# EAGLE board ChairControl (EAGLE 8.7.0)
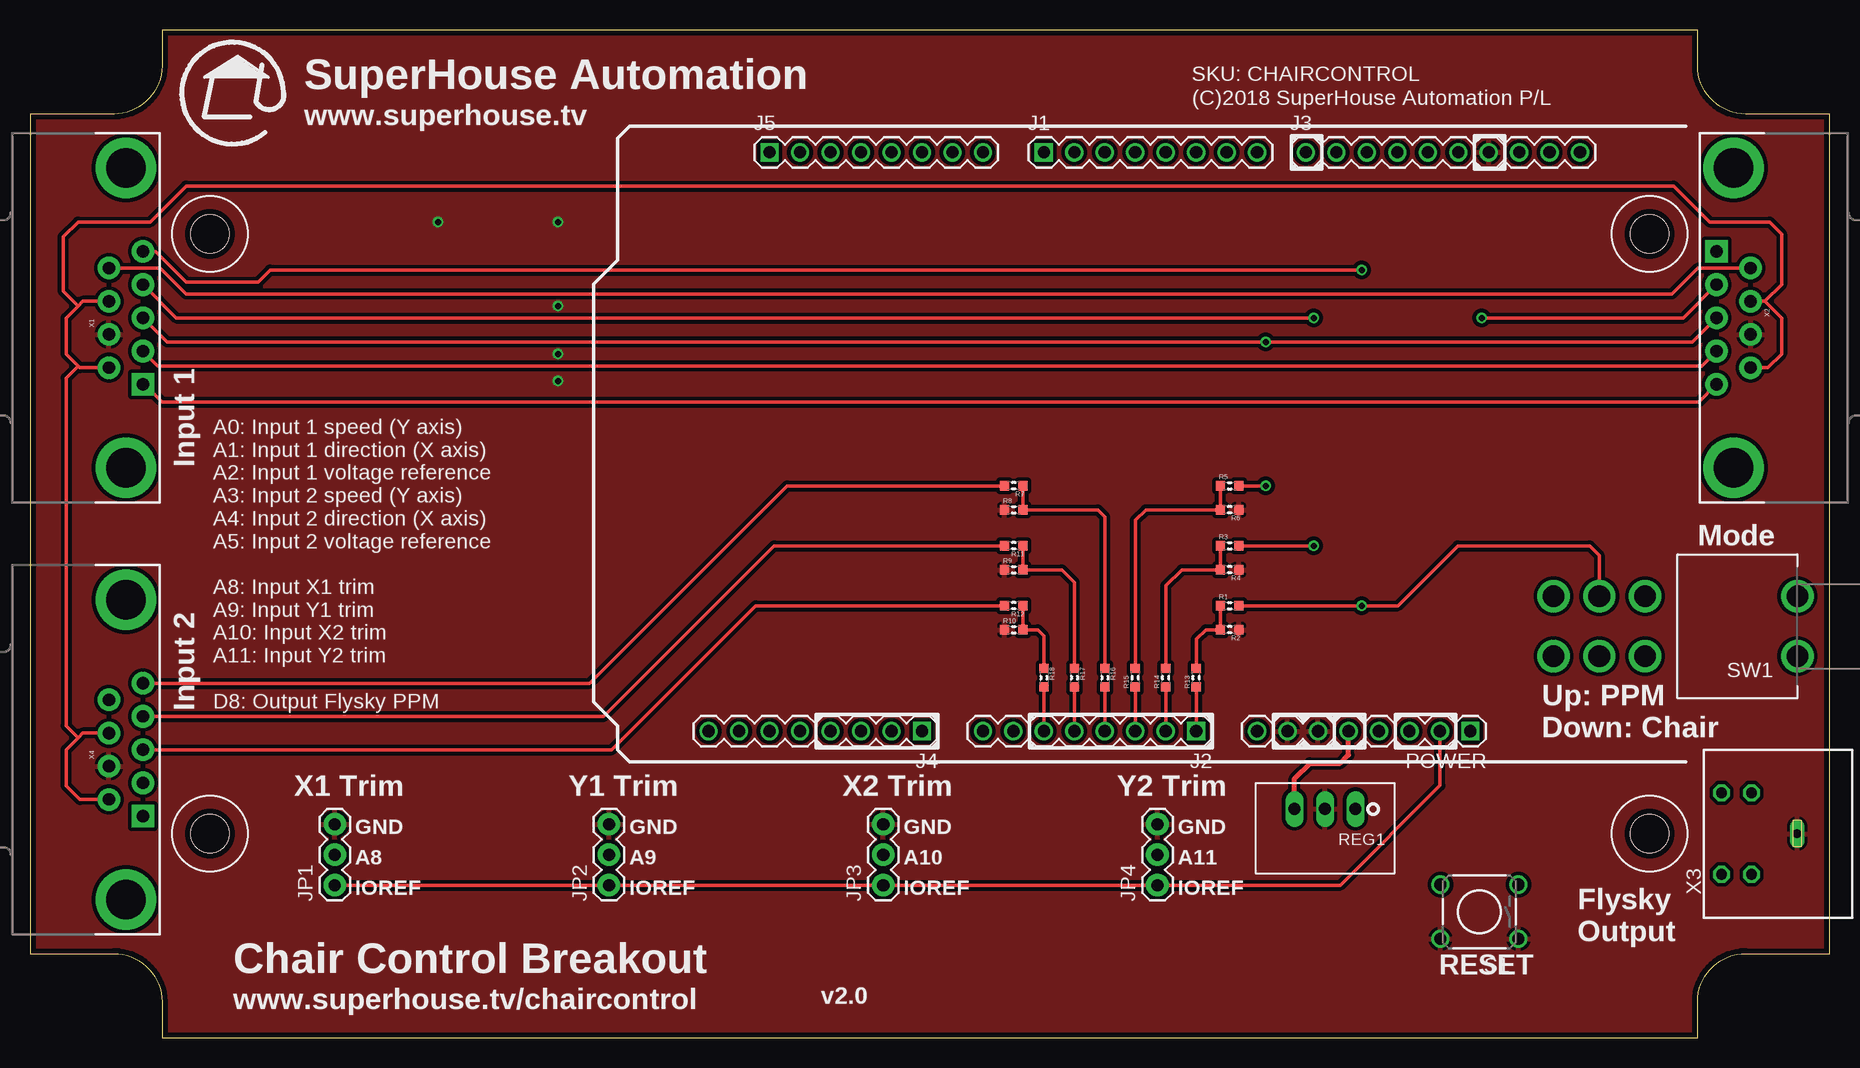
[diagram p0: board, top side]
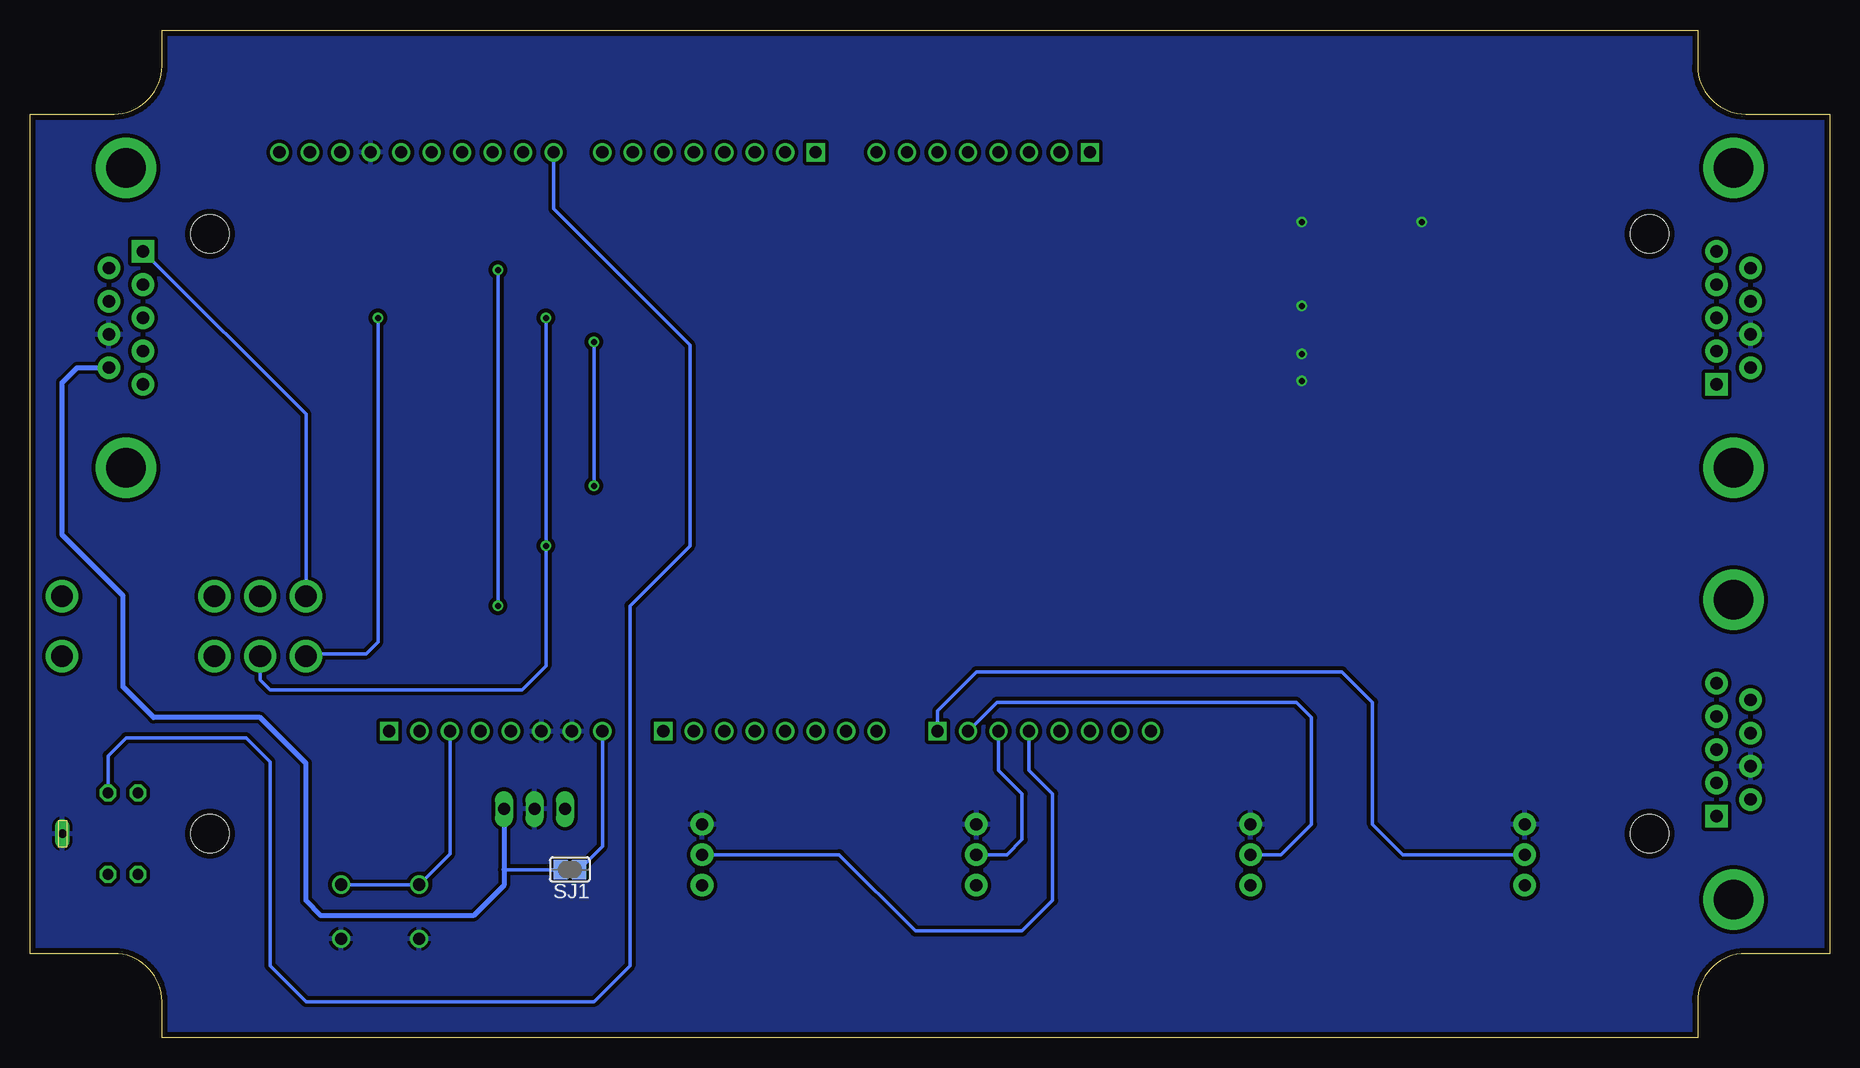
[diagram p1: board, bottom side, seen from below]

Size 150 x 84 mm. Coordinates in mm from the lower left corner, seen from the top.
Outline: 143,77 arc-90 139,81 139,84 11,84 11,81 arc-90 7,77 0,77 0,7 7,7 arc-90 11,3 11,0 139,0 139,3 arc-90 143,7 150,7 150,77 143,77
Copper layers (1*16): Top 0.035mm / dielectric 1.5mm / Bottom 0.035mm
Design rules "default *": minimum track width 10mil, minimum drill 24mil, track to track 12mil, track to pad 12mil, pad to pad 12mil, via to via 12mil, smd to smd 8mil, copper to edge 18mil, drill to drill 8mil, minimum pad ring 10mil, minimum via ring 8mil, stop-mask expansion 4mil, vias tented up to drill 0mil, thermal gap 10mil
Holes 3.2 mm at 15,67 15,17 135,67 135,17

## Footprints (pad centres in the part's own frame; a part is rotated, then mirrored left to right if it is on the bottom)
1X08 = drill 1.016 square: 1 0,0 | drill 1.016: 2 2.54,0; 3 5.08,0; 4 7.62,0; 5 10.16,0; 6 12.7,0; 7 15.24,0; 8 17.78,0
1X10 = drill 1.016: 1 0,0; 2 2.54,0; 3 5.08,0; 4 7.62,0; 5 10.16,0; 6 12.7,0; 7 15.24,0; 8 17.78,0; 9 20.32,0; 10 22.86,0
1X03 = drill 1.016 pad 1.88: 1 0,0; 2 2.54,0; 3 5.08,0
0603 = smd 0.762 x 0.762: 1 -0.762,0; 2 0.762,0
K78XX-500R3 = drill 1 long: 1 -2.54,0; 2 0,0; 3 2.54,0
TACTILE-PTH = drill 1.016: 1 -3.251,2.261; 2 3.251,2.261; 3 -3.251,-2.261; 4 3.251,-2.261
SJ = smd 1.168 x 1.6: 1 -0.762,0; 2 0.762,0
7201SD9AV2BE = drill 1.8: 1 12.7,-2.5; 2 16.51,-2.5; 3 20.32,-2.5; 4 20.32,2.5; 5 16.51,2.5; 6 12.7,2.5; 7 0,2.5; 8 0,-2.5
DB9_MALE = drill 1.016 pad 1.88: 1 5.54,-1.42; 2 2.77,-1.42; 3 0,-1.42; 4 -2.77,-1.42; 6 4.15,1.42; 7 1.38,1.42; 8 -1.38,1.42; 9 -4.15,1.42 | drill 1.016 pad 1.88 square: 5 -5.54,-1.42 | drill 3.302 pad 5.08: G1 -12.5,0; G2 12.5,0
DB9 = drill 1.016 pad 1.88 square: 1 -5.54,-1.42 | drill 1.016 pad 1.88: 2 -2.77,-1.42; 3 0,-1.42; 4 2.77,-1.42; 5 5.54,-1.42; 6 -4.15,1.42; 7 -1.38,1.42; 8 1.38,1.42; 9 4.15,1.42 | drill 3.302 pad 5.08: G1 -12.5,0; G2 12.5,0
MDIN04S = drill 0.9 octagon: 1 3.4,8.5; 2 -3.4,8.5; 3 3.4,11; 4 -3.4,11 | drill 0.7 long: M 0,4.7

## Placement (x,y rotation side)
J1  Digital_0_7  [1X08]  84.51,73.8 0 top
J2  Analog  [1X08]  97.21,25.54 180 top
J3  Digital_8_13  [1X10]  106.35,73.8 0 top
J4  Analog  [1X08]  74.35,25.54 180 top
J5  Digital_0_7  [1X08]  61.65,73.8 0 top
JP1  [1X03]  25.4,12.7 90 top
JP2  [1X03]  48.26,12.7 90 top
JP3  [1X03]  71.12,12.7 90 top
JP4  [1X03]  93.98,12.7 90 top
POWER  Power  [1X08]  120.07,25.54 180 top
R1  47K 1%  [0603]  100,36 0 top
R2  47K 1%  [0603]  100,34 180 top
R3  47K 1%  [0603]  100,41 0 top
R4  47K 1%  [0603]  100,39 180 top
R5  47K 1%  [0603]  100,46 0 top
R6  47K 1%  [0603]  100,44 180 top
R7  47K 1%  [0603]  82,46 180 top
R8  47K 1%  [0603]  82,44 0 top
R9  47K 1%  [0603]  82,39 0 top
R10  47K 1%  [0603]  82,34 0 top
R11  47K 1%  [0603]  82,41 180 top
R12  47K 1%  [0603]  82,36 180 top
R13  1K  [0603]  97.21,30 90 top
R14  1K  [0603]  94.67,30 90 top
R15  1K  [0603]  92.13,30 90 top
R16  1K  [0603]  89.59,30 270 top
R17  1K  [0603]  87.05,30 270 top
R18  1K  [0603]  84.51,30 270 top
REG1  K7805-500R3  [K78XX-500R3]  107.95,19.05 180 top
S1  RESET  [TACTILE-PTH]  120.82,10.49 180 top
SJ1  [SJ]  105,14 180 bottom
SW1  SWITCH-DPDT3  [7201SD9AV2BE]  147.32,34.29 180 top
X1  INPUT  [DB9_MALE]  8,60 90 top
X2  OUTPUT  [DB9]  142,60 270 top
X3  [MDIN04S]  152,17 90 top
X4  INPUT  [DB9_MALE]  8,24 90 top

## Library data of the parts
J1 J5 S1 = freetronics
J2 J4 JP1-JP4 R1-R18 REG1 SJ1 SW1 = freetronics-jon
J3 POWER = freetronics-original
X1 X2 X4 = SparkFun-Connectors
X3 = freetronics-jon; OC_FARNELL: unknown; OC_NEWARK: unknown

## Nets
3V3: POWER.4
5V: POWER.5 REG1.3
12V: REG1.1 SJ1.2 X1.7 X1.9 X2.7 X2.9 X4.7 X4.9
A0: J2.1 R13.1
A1: J2.2 R14.1
A2: J2.3 R15.1
A3: J2.4 R16.2
A4: J2.5 R17.2
A5: J2.6 R18.2
A8: J4.1 JP1.2
A9: J4.2 JP2.2
A10: J4.3 JP3.2
A11: J4.4 JP4.2
AREF: J3.8
D0_RX: J1.1
D1_TX: J1.2
D2: J1.3
D3: J1.4
D4: J1.5
D5: J1.6
D6: J1.7
D7: J1.8
D8: J3.1 X3.1
D9: J3.2
D10: J3.3
D11_MOSI: J3.4
D12_MISO: J3.5
D13_SCK: J3.6
DETECT: X1.5 X2.5
DIRECTION_IN: R3.2 SW1.5 X1.2
DIRECTION_IN_2: R11.2 X4.2
DIRECTION_OUT: SW1.4 X2.2
GND: J3.7 JP1.3 JP2.3 JP3.3 JP4.3 POWER.6 POWER.7 R2.1 R4.1 R6.1 R8.1 R9.1 R10.1 REG1.2 S1.1 S1.2 X1.8 X2.8 X3.M X4.8
IOREF: JP1.1 JP2.1 JP3.1 JP4.1 POWER.2
N$1: X1.6 X2.6
N$2: R1.1 R2.2 R13.2
N$3: R3.1 R4.2 R14.2
N$4: R5.1 R6.2 R15.2
N$6: X1.4 X2.4
N$7: R7.1 R8.2 R16.1
N$8: R9.2 R11.1 R17.1
N$9: R10.2 R12.1 R18.1
NC: POWER.1
REFERENCE: R5.2 X1.3 X2.3
REFERENCE_2: R12.2 X4.3
RESET: POWER.3 S1.3 S1.4
SCL: J3.10
SDA: J3.9
SPEED_IN: R1.2 SW1.2 X1.1
SPEED_IN_2: R7.2 X4.1
SPEED_OUT: SW1.3 X2.1
VIN: POWER.8 SJ1.1

## Tracks (layer width: path | path; a pad name or v marks a point on that pad's centre or on a via)
5V
  Top 0.406: REG1.3 105.41,21.59 106.68,22.86 109.22,22.86 109.91,23.55 POWER.5
12V
  Top 0.305: X2.7 144.62,61.38 | X2.9 144.85,55.85 146,57 146,60 144.62,61.38 | X1.7 4.38,61.38 4,61 | 4,61 3,60 3,57 4,56 | X1.9 4.15,55.85 4,56 | X4.7 4.38,25.38 4,25 | 4,25 3,24 3,21 4.15,19.85 X4.9 | 4,56 3,55 3,26 4,25 | 4,61 2.76,62.24 2.76,66.76 4,68 10,68 13,71 137,71 140,68 145,68 146,67 146,62.76 144.62,61.38
  Bottom 0.305: SJ1.2 110.49,14
  Bottom 0.406: X2.9 146.08,55.85 147.32,54.61 147.32,41.91 142.24,36.83 142.24,29.21 139.7,26.67 130.81,26.67 127,22.86 127,11.43 125.73,10.16 113.03,10.16 110.49,12.7 110.49,14 REG1.1
A0
  Top 0.305: R13.1 J2.1
A1
  Top 0.305: R14.1 J2.2
A2
  Top 0.305: R15.1 J2.3
A3
  Top 0.305: R16.2 J2.4
A4
  Top 0.305: R17.2 J2.5
A5
  Top 0.305: R18.2 J2.6
A8
  Bottom 0.305: JP1.2 35.56,15.24 38.1,17.78 38.1,27.94 40.64,30.48 71.12,30.48 74.35,27.25 J4.1
A9
  Bottom 0.305: JP2.2 45.72,15.24 43.18,17.78 43.18,26.67 44.45,27.94 69.41,27.94 J4.2
A10
  Bottom 0.305: JP3.2 68.58,15.24 67.31,16.51 67.31,20.32 69.27,22.28 J4.3
A11
  Bottom 0.305: JP4.2 82.55,15.24 76.2,8.89 67.31,8.89 64.77,11.43 64.77,20.32 66.73,22.28 J4.4
D8
  Bottom 0.305: J3.1 106.35,69.08 95,57.73 95,41 100,36 100,6 103,3 127,3 130,6 130,23 132,25 142,25 143.5,23.5 X3.1
DETECT
  Top 0.305: X1.5 9.54,54.46 11,53 139.12,53 X2.5
DIRECTION_IN  (via drill 0.5)
  Top 0.305: X1.2 12.19,60 v107,60 | v107,41 R3.2
  Bottom 0.305: v107,60 v107,41 107,31 109,29 130,29 130.81,29.81 SW1.5
DIRECTION_IN_2
  Top 0.305: X4.2 47.8,26.77 62.03,41 R11.2
DIRECTION_OUT  (via drill 0.5)
  Top 0.305: v121,60 137.81,60 X2.2
  Bottom 0.305: SW1.4 126.79,32 122,32 121,33 v121,60
GND  (via drill 0.5)
  other vias: 44,68 44,61 34,68 44,57 44,54.75
  pour Bottom: 143,7 arc90 139,3 139,0 11,0 11,3 arc90 7,7 0,7 0,77 7,77 arc90 11,81 11,84 139,84 139,81 arc90 143,77 150,77 150,7
  pour Top: 143,7 arc90 139,3 139,0 11,0 11,3 arc90 7,7 0,7 0,77 7,77 arc90 11,81 11,84 139,84 139,81 arc90 143,77 150,77 150,7
IOREF
  Top 0.305: JP1.1 JP2.1 JP3.1 JP4.1 109.22,12.7 117.53,21.01 POWER.2
N$1
  Top 0.254: X2.6
  Top 0.305: X1.6 10.85,64.15 13,62 136.87,62 139.01,64.14 X2.6
N$2
  Top 0.305: R1.1 R2.2 98,34 97.21,33.21 R13.2
N$3
  Top 0.305: R3.1 R4.2 96,39 94.67,37.67 R14.2
N$4
  Top 0.305: R5.1 R6.2 93,44 92.13,43.13 R15.2
N$6
  Top 0.305: X1.4 10.65,56 139.35,56 X2.4
N$7
  Top 0.305: R7.1 R8.2 89,44 89.59,43.41 R16.1
N$8
  Top 0.305: R11.1 R9.2 86,39 87.05,37.95 R17.1
N$9
  Top 0.305: R12.1 R10.2 84,34 84.51,33.49 R18.1
REFERENCE  (via drill 0.5)
  Top 0.305: X1.3 11.42,58 v103,58 138.58,58 X2.3 | R5.2 v103,46
  Bottom 0.305: v103,46 v103,58
REFERENCE_2
  Top 0.305: X4.3 48.49,24 60.49,36 R12.2
RESET
  Bottom 0.305: S1.3 S1.4 114.99,15.32 POWER.3
SPEED_IN  (via drill 0.5)
  Top 0.305: X1.1 10.46,65.54 13,63 19,63 20,64 v111,64 | R1.2 v111,36 114,36 119,41 130,41 130.81,40.19 SW1.2
  Bottom 0.305: v111,64 v111,36
SPEED_IN_2
  Top 0.305: X4.1 46.65,29.54 63.11,46 R7.2
SPEED_OUT
  Bottom 0.305: SW1.3 127,51.96 X2.1
VIN
  Bottom 0.305: SJ1.1 102.29,15.95 POWER.8

## Text on the board
tPlace: SKU: CHAIRCONTROL | SuperHouse Automation | (C)2018 SuperHouse Automation P/L | www.superhouse.tv | Input 1 | Mode | Input 2 | A0: Input 1 speed (Y axis) / A1: Input 1 direction (X axis) / A2: Input 1 voltage reference / A3: Input 2 speed (Y axis) / A4: Input 2 direction (X axis) / A5: Input 2 voltage reference / / A8: Input X1 trim / A9: Input Y1 trim / A10: Input X2 trim / A11: Input Y2 trim / / D8: Output Flysky PPM | Up: PPM / Down: Chair | X1 Trim | Y1 Trim | X2 Trim | Y2 Trim | GND | GND | GND | GND | A8 | A9 | A10 | A11 | IOREF | IOREF | IOREF | IOREF | Flysky / Output | Chair Control Breakout | RESET | v2.0 | www.superhouse.tv/chaircontrol